# EAGLE board MyoWare_Power_Shield_Panel_v10 (EAGLE 7.4.0)
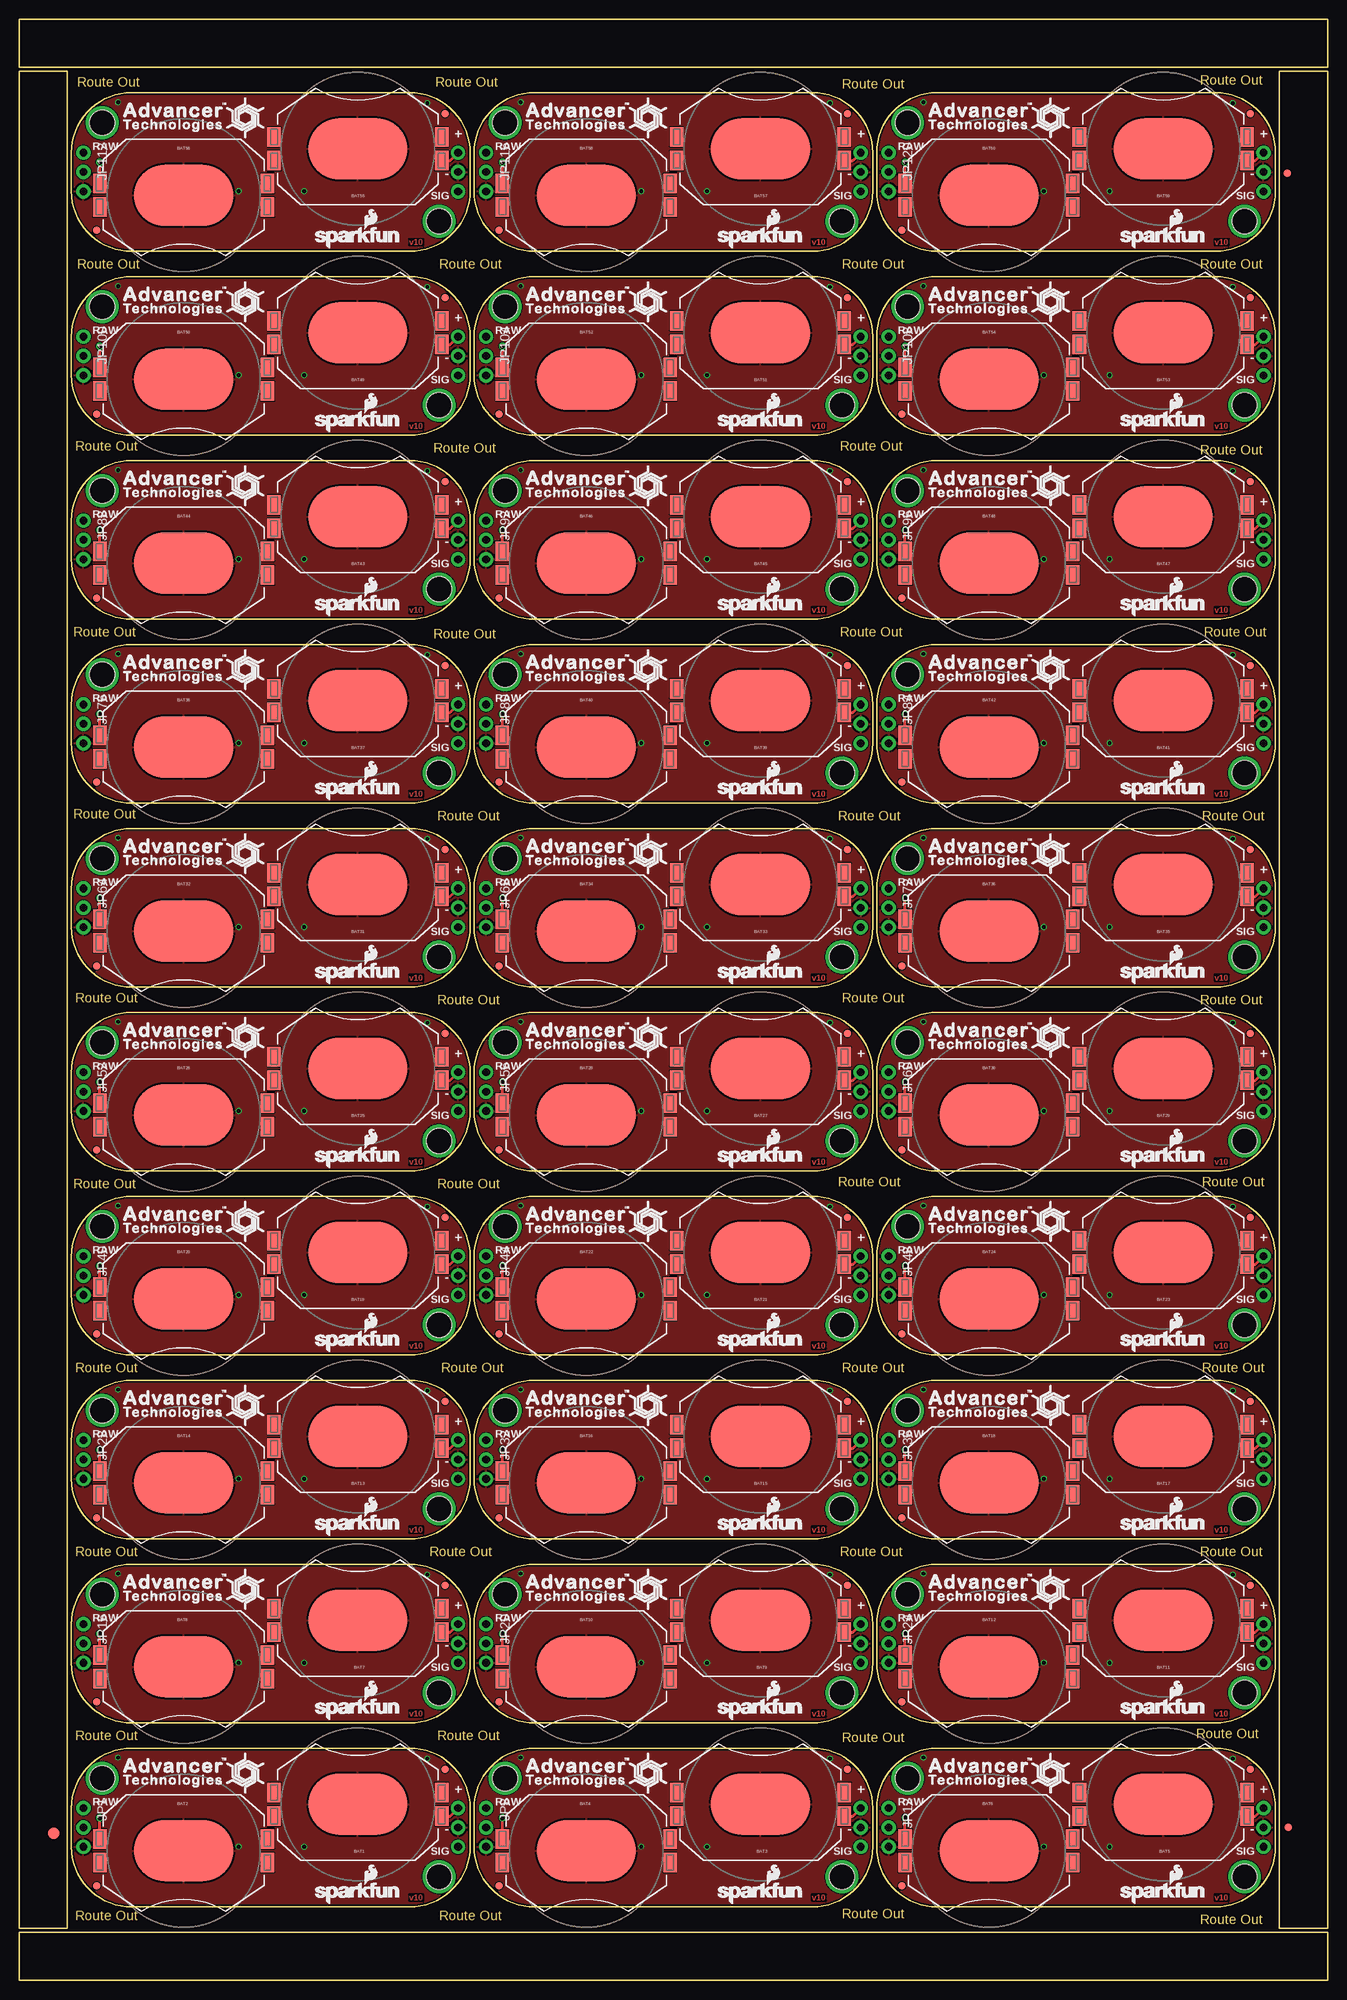
[diagram p0: board, top side]
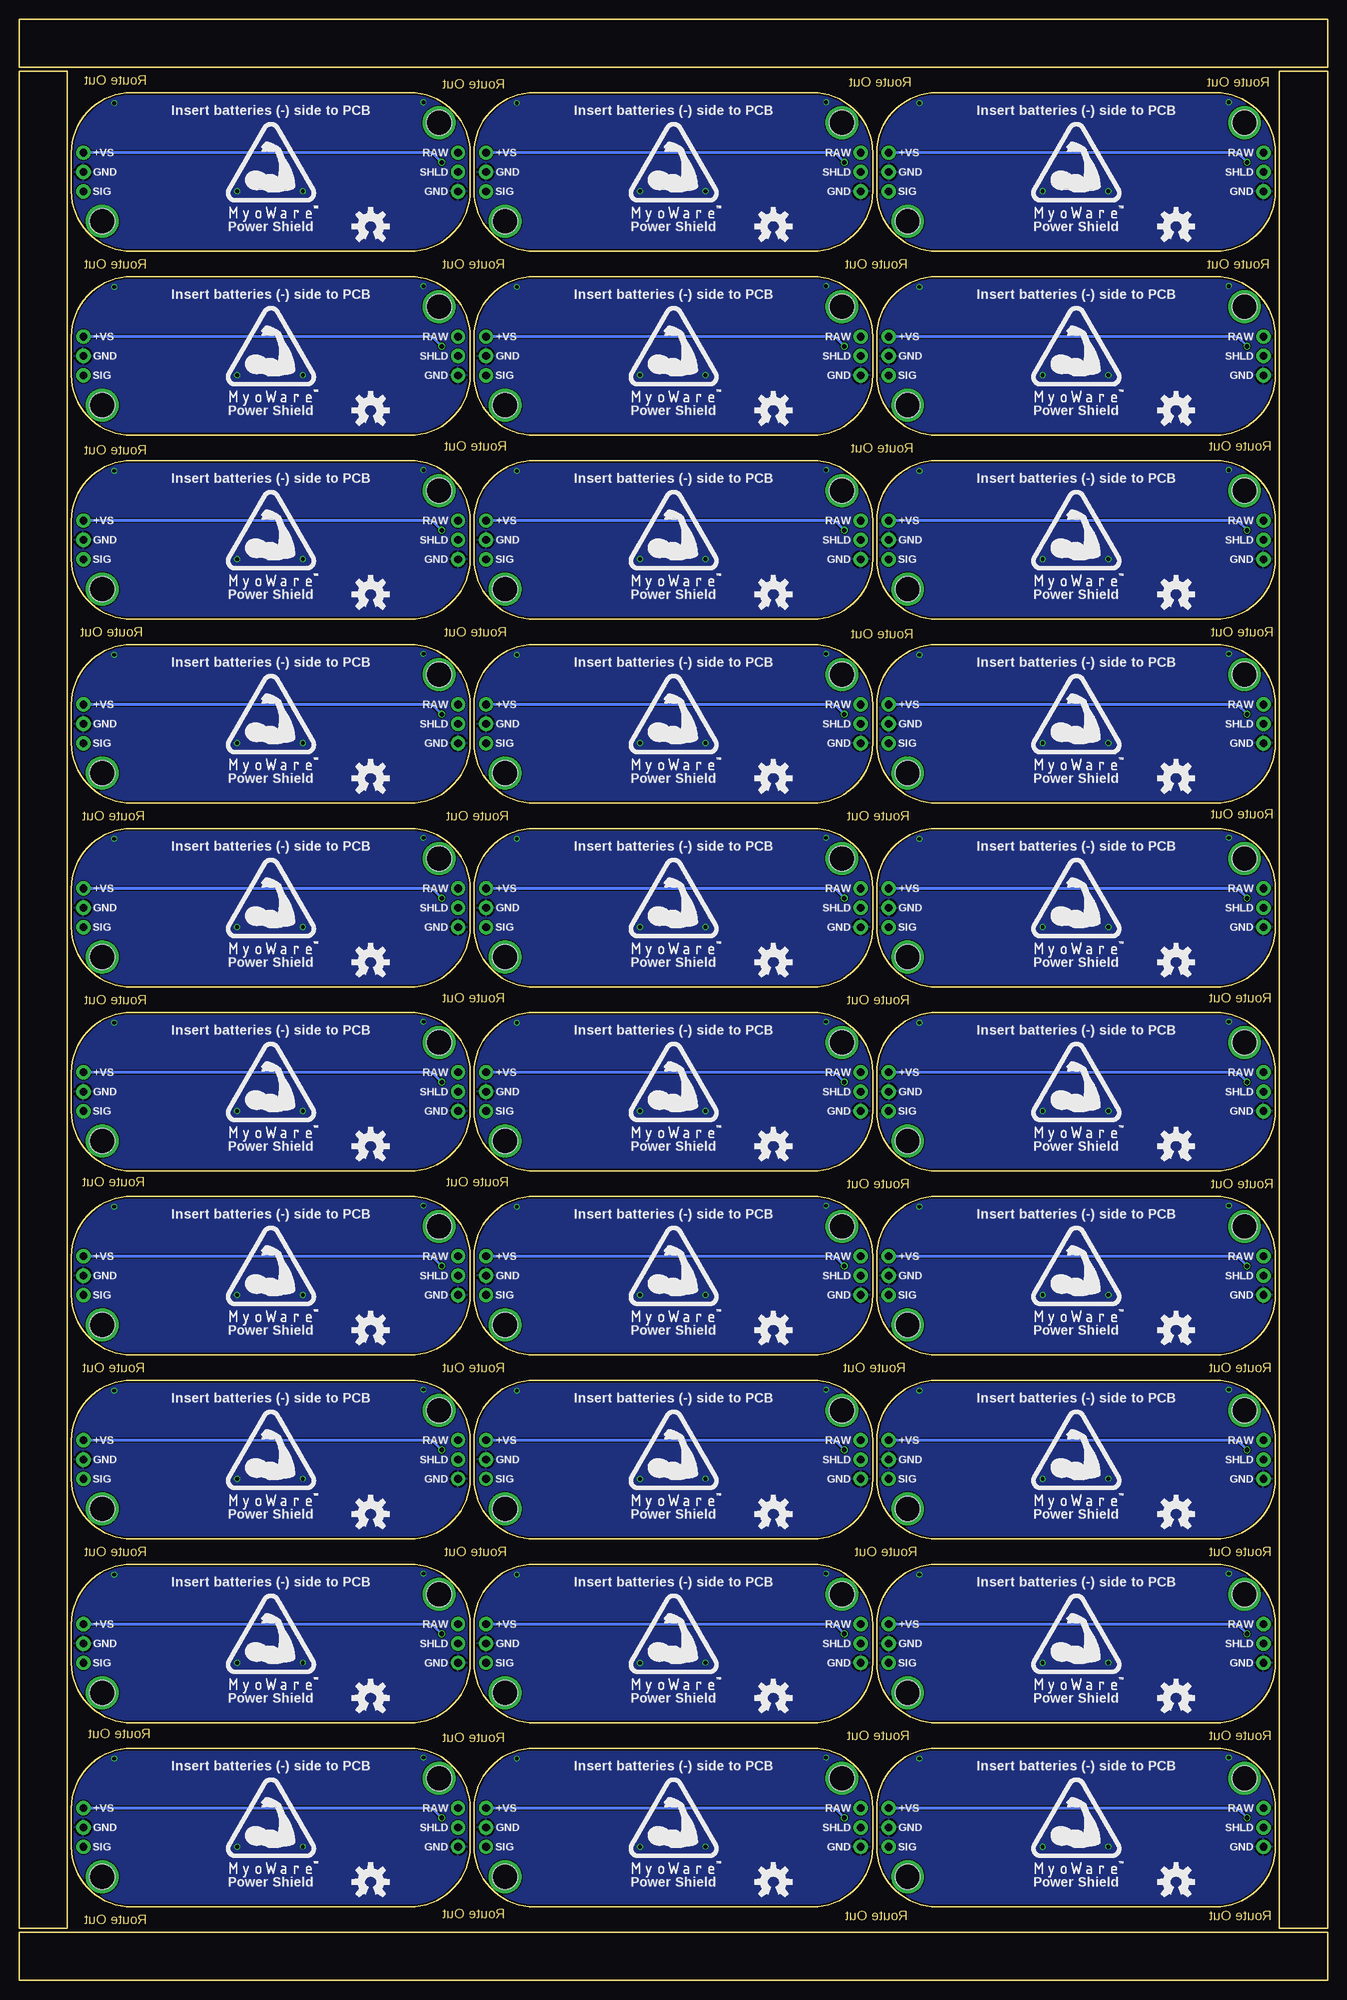
[diagram p1: board, bottom side, seen from below]

Size 171.7 x 257.3 mm. Coordinates in mm from the lower left corner, seen from the top.
Outline: 264 segments
Copper layers (1*16): Top 0.035mm / dielectric 1.5mm / Bottom 0.035mm
Design rules "Gold_Phoenix_Standard_Spec_2_layer": minimum track width 5mil, minimum drill 6mil, track to track 5mil, track to pad 5mil, pad to pad 5mil, via to via 5mil, smd to smd 5mil, copper to edge 8mil, drill to drill 8mil, minimum pad ring 5mil, minimum via ring 5mil, stop-mask expansion 4mil, vias tented up to drill 20mil, thermal gap 10mil

## Footprints (pad centres in the part's own frame; a part is rotated, then mirrored left to right if it is on the bottom)
BATTCON_20MM_4LEGS = smd 1.778 x 2.54: 1 -11,1.55; 3 11,1.55; P$1 -11,-1.55; P$2 11,-1.55 | smd 13 x 8: 2 0,0
FIDUCIAL-1.5X3 = smd 1.5 x 1.5: 1 0,0
FIDUCIAL-1X2 = smd 1 x 1: 1 0,0
1X03_NO_SILK = drill 1.016 pad 1.88: 1 0,0; 2 2.54,0; 3 5.08,0
STAND-OFF = hole 3.302: 0,0

## Placement (x,y rotation side)
BAT1  20mm coincell  [BATTCON_20MM_4LEGS]  44.45,23.11 180 top
BAT2  20mm coincell  [BATTCON_20MM_4LEGS]  21.59,17.02 0 top
BAT3  20mm coincell  [BATTCON_20MM_4LEGS]  97.28,23.11 180 top
BAT4  20mm coincell  [BATTCON_20MM_4LEGS]  74.42,17.02 0 top
BAT5  20mm coincell  [BATTCON_20MM_4LEGS]  150.11,23.11 180 top
BAT6  20mm coincell  [BATTCON_20MM_4LEGS]  127.25,17.02 0 top
BAT7  20mm coincell  [BATTCON_20MM_4LEGS]  44.45,47.24 180 top
BAT8  20mm coincell  [BATTCON_20MM_4LEGS]  21.59,41.15 0 top
BAT9  20mm coincell  [BATTCON_20MM_4LEGS]  97.28,47.24 180 top
BAT10  20mm coincell  [BATTCON_20MM_4LEGS]  74.42,41.15 0 top
BAT11  20mm coincell  [BATTCON_20MM_4LEGS]  150.11,47.24 180 top
BAT12  20mm coincell  [BATTCON_20MM_4LEGS]  127.25,41.15 0 top
BAT13  20mm coincell  [BATTCON_20MM_4LEGS]  44.45,71.37 180 top
BAT14  20mm coincell  [BATTCON_20MM_4LEGS]  21.59,65.28 0 top
BAT15  20mm coincell  [BATTCON_20MM_4LEGS]  97.28,71.37 180 top
BAT16  20mm coincell  [BATTCON_20MM_4LEGS]  74.42,65.28 0 top
BAT17  20mm coincell  [BATTCON_20MM_4LEGS]  150.11,71.37 180 top
BAT18  20mm coincell  [BATTCON_20MM_4LEGS]  127.25,65.28 0 top
BAT19  20mm coincell  [BATTCON_20MM_4LEGS]  44.45,95.5 180 top
BAT20  20mm coincell  [BATTCON_20MM_4LEGS]  21.59,89.41 0 top
BAT21  20mm coincell  [BATTCON_20MM_4LEGS]  97.28,95.5 180 top
BAT22  20mm coincell  [BATTCON_20MM_4LEGS]  74.42,89.41 0 top
BAT23  20mm coincell  [BATTCON_20MM_4LEGS]  150.11,95.5 180 top
BAT24  20mm coincell  [BATTCON_20MM_4LEGS]  127.25,89.41 0 top
BAT25  20mm coincell  [BATTCON_20MM_4LEGS]  44.45,119.63 180 top
BAT26  20mm coincell  [BATTCON_20MM_4LEGS]  21.59,113.54 0 top
BAT27  20mm coincell  [BATTCON_20MM_4LEGS]  97.28,119.63 180 top
BAT28  20mm coincell  [BATTCON_20MM_4LEGS]  74.42,113.54 0 top
BAT29  20mm coincell  [BATTCON_20MM_4LEGS]  150.11,119.63 180 top
BAT30  20mm coincell  [BATTCON_20MM_4LEGS]  127.25,113.54 0 top
BAT31  20mm coincell  [BATTCON_20MM_4LEGS]  44.45,143.76 180 top
BAT32  20mm coincell  [BATTCON_20MM_4LEGS]  21.59,137.67 0 top
BAT33  20mm coincell  [BATTCON_20MM_4LEGS]  97.28,143.76 180 top
BAT34  20mm coincell  [BATTCON_20MM_4LEGS]  74.42,137.67 0 top
BAT35  20mm coincell  [BATTCON_20MM_4LEGS]  150.11,143.76 180 top
BAT36  20mm coincell  [BATTCON_20MM_4LEGS]  127.25,137.67 0 top
BAT37  20mm coincell  [BATTCON_20MM_4LEGS]  44.45,167.89 180 top
BAT38  20mm coincell  [BATTCON_20MM_4LEGS]  21.59,161.8 0 top
BAT39  20mm coincell  [BATTCON_20MM_4LEGS]  97.28,167.89 180 top
BAT40  20mm coincell  [BATTCON_20MM_4LEGS]  74.42,161.8 0 top
BAT41  20mm coincell  [BATTCON_20MM_4LEGS]  150.11,167.89 180 top
BAT42  20mm coincell  [BATTCON_20MM_4LEGS]  127.25,161.8 0 top
BAT43  20mm coincell  [BATTCON_20MM_4LEGS]  44.45,192.02 180 top
BAT44  20mm coincell  [BATTCON_20MM_4LEGS]  21.59,185.93 0 top
BAT45  20mm coincell  [BATTCON_20MM_4LEGS]  97.28,192.02 180 top
BAT46  20mm coincell  [BATTCON_20MM_4LEGS]  74.42,185.93 0 top
BAT47  20mm coincell  [BATTCON_20MM_4LEGS]  150.11,192.02 180 top
BAT48  20mm coincell  [BATTCON_20MM_4LEGS]  127.25,185.93 0 top
BAT49  20mm coincell  [BATTCON_20MM_4LEGS]  44.45,216.15 180 top
BAT50  20mm coincell  [BATTCON_20MM_4LEGS]  21.59,210.06 0 top
BAT51  20mm coincell  [BATTCON_20MM_4LEGS]  97.28,216.15 180 top
BAT52  20mm coincell  [BATTCON_20MM_4LEGS]  74.42,210.06 0 top
BAT53  20mm coincell  [BATTCON_20MM_4LEGS]  150.11,216.15 180 top
BAT54  20mm coincell  [BATTCON_20MM_4LEGS]  127.25,210.06 0 top
BAT55  20mm coincell  [BATTCON_20MM_4LEGS]  44.45,240.28 180 top
BAT56  20mm coincell  [BATTCON_20MM_4LEGS]  21.59,234.19 0 top
BAT57  20mm coincell  [BATTCON_20MM_4LEGS]  97.28,240.28 180 top
BAT58  20mm coincell  [BATTCON_20MM_4LEGS]  74.42,234.19 0 top
BAT59  20mm coincell  [BATTCON_20MM_4LEGS]  150.11,240.28 180 top
BAT60  20mm coincell  [BATTCON_20MM_4LEGS]  127.25,234.19 0 top
E$1  [FIDUCIAL-1.5X3]  4.57,19.3 0 top
E$5  [FIDUCIAL-1X2]  166.5,20.07 0 top
E$8  [FIDUCIAL-1X2]  166.37,237.11 90 top
FID1  FIDUCIAL1X2  [FIDUCIAL-1X2]  10.16,12.45 0 top
FID2  FIDUCIAL1X2  [FIDUCIAL-1X2]  55.88,27.69 0 top
FID3  FIDUCIAL1X2  [FIDUCIAL-1X2]  62.99,12.45 0 top
FID4  FIDUCIAL1X2  [FIDUCIAL-1X2]  108.71,27.69 0 top
FID5  FIDUCIAL1X2  [FIDUCIAL-1X2]  115.82,12.45 0 top
FID6  FIDUCIAL1X2  [FIDUCIAL-1X2]  161.54,27.69 0 top
FID7  FIDUCIAL1X2  [FIDUCIAL-1X2]  10.16,36.58 0 top
FID8  FIDUCIAL1X2  [FIDUCIAL-1X2]  55.88,51.82 0 top
FID9  FIDUCIAL1X2  [FIDUCIAL-1X2]  62.99,36.58 0 top
FID10  FIDUCIAL1X2  [FIDUCIAL-1X2]  108.71,51.82 0 top
FID11  FIDUCIAL1X2  [FIDUCIAL-1X2]  115.82,36.58 0 top
FID12  FIDUCIAL1X2  [FIDUCIAL-1X2]  161.54,51.82 0 top
FID13  FIDUCIAL1X2  [FIDUCIAL-1X2]  10.16,60.71 0 top
FID14  FIDUCIAL1X2  [FIDUCIAL-1X2]  55.88,75.95 0 top
FID15  FIDUCIAL1X2  [FIDUCIAL-1X2]  62.99,60.71 0 top
FID16  FIDUCIAL1X2  [FIDUCIAL-1X2]  108.71,75.95 0 top
FID17  FIDUCIAL1X2  [FIDUCIAL-1X2]  115.82,60.71 0 top
FID18  FIDUCIAL1X2  [FIDUCIAL-1X2]  161.54,75.95 0 top
FID19  FIDUCIAL1X2  [FIDUCIAL-1X2]  10.16,84.84 0 top
FID20  FIDUCIAL1X2  [FIDUCIAL-1X2]  55.88,100.08 0 top
FID21  FIDUCIAL1X2  [FIDUCIAL-1X2]  62.99,84.84 0 top
FID22  FIDUCIAL1X2  [FIDUCIAL-1X2]  108.71,100.08 0 top
FID23  FIDUCIAL1X2  [FIDUCIAL-1X2]  115.82,84.84 0 top
FID24  FIDUCIAL1X2  [FIDUCIAL-1X2]  161.54,100.08 0 top
FID25  FIDUCIAL1X2  [FIDUCIAL-1X2]  10.16,108.97 0 top
FID26  FIDUCIAL1X2  [FIDUCIAL-1X2]  55.88,124.21 0 top
FID27  FIDUCIAL1X2  [FIDUCIAL-1X2]  62.99,108.97 0 top
FID28  FIDUCIAL1X2  [FIDUCIAL-1X2]  108.71,124.21 0 top
FID29  FIDUCIAL1X2  [FIDUCIAL-1X2]  115.82,108.97 0 top
FID30  FIDUCIAL1X2  [FIDUCIAL-1X2]  161.54,124.21 0 top
FID31  FIDUCIAL1X2  [FIDUCIAL-1X2]  10.16,133.1 0 top
FID32  FIDUCIAL1X2  [FIDUCIAL-1X2]  55.88,148.34 0 top
FID33  FIDUCIAL1X2  [FIDUCIAL-1X2]  62.99,133.1 0 top
FID34  FIDUCIAL1X2  [FIDUCIAL-1X2]  108.71,148.34 0 top
FID35  FIDUCIAL1X2  [FIDUCIAL-1X2]  115.82,133.1 0 top
FID36  FIDUCIAL1X2  [FIDUCIAL-1X2]  161.54,148.34 0 top
FID37  FIDUCIAL1X2  [FIDUCIAL-1X2]  10.16,157.23 0 top
FID38  FIDUCIAL1X2  [FIDUCIAL-1X2]  55.88,172.47 0 top
FID39  FIDUCIAL1X2  [FIDUCIAL-1X2]  62.99,157.23 0 top
FID40  FIDUCIAL1X2  [FIDUCIAL-1X2]  108.71,172.47 0 top
FID41  FIDUCIAL1X2  [FIDUCIAL-1X2]  115.82,157.23 0 top
FID42  FIDUCIAL1X2  [FIDUCIAL-1X2]  161.54,172.47 0 top
FID43  FIDUCIAL1X2  [FIDUCIAL-1X2]  10.16,181.36 0 top
FID44  FIDUCIAL1X2  [FIDUCIAL-1X2]  55.88,196.6 0 top
FID45  FIDUCIAL1X2  [FIDUCIAL-1X2]  62.99,181.36 0 top
FID46  FIDUCIAL1X2  [FIDUCIAL-1X2]  108.71,196.6 0 top
FID47  FIDUCIAL1X2  [FIDUCIAL-1X2]  115.82,181.36 0 top
FID48  FIDUCIAL1X2  [FIDUCIAL-1X2]  161.54,196.6 0 top
FID49  FIDUCIAL1X2  [FIDUCIAL-1X2]  10.16,205.49 0 top
FID50  FIDUCIAL1X2  [FIDUCIAL-1X2]  55.88,220.73 0 top
FID51  FIDUCIAL1X2  [FIDUCIAL-1X2]  62.99,205.49 0 top
FID52  FIDUCIAL1X2  [FIDUCIAL-1X2]  108.71,220.73 0 top
FID53  FIDUCIAL1X2  [FIDUCIAL-1X2]  115.82,205.49 0 top
FID54  FIDUCIAL1X2  [FIDUCIAL-1X2]  161.54,220.73 0 top
FID55  FIDUCIAL1X2  [FIDUCIAL-1X2]  10.16,229.62 0 top
FID56  FIDUCIAL1X2  [FIDUCIAL-1X2]  55.88,244.86 0 top
FID57  FIDUCIAL1X2  [FIDUCIAL-1X2]  62.99,229.62 0 top
FID58  FIDUCIAL1X2  [FIDUCIAL-1X2]  108.71,244.86 0 top
FID59  FIDUCIAL1X2  [FIDUCIAL-1X2]  115.82,229.62 0 top
FID60  FIDUCIAL1X2  [FIDUCIAL-1X2]  161.54,244.86 0 top
JP1  RAW  [1X03_NO_SILK]  8.45,22.61 270 top
JP2  PROCESSED  [1X03_NO_SILK]  57.59,22.61 270 top
JP3  STAND-OFF  [STAND-OFF]  55.12,13.59 0 top
JP4  STAND-OFF  [STAND-OFF]  10.92,26.54 0 top
JP5  PROCESSED  [1X03_NO_SILK]  110.43,22.61 270 top
JP6  STAND-OFF  [STAND-OFF]  107.95,13.59 0 top
JP7  STAND-OFF  [STAND-OFF]  63.75,26.54 0 top
JP8  RAW  [1X03_NO_SILK]  61.28,22.61 270 top
JP9  PROCESSED  [1X03_NO_SILK]  163.26,22.61 270 top
JP10  STAND-OFF  [STAND-OFF]  160.78,13.59 0 top
JP11  STAND-OFF  [STAND-OFF]  116.59,26.54 0 top
JP12  RAW  [1X03_NO_SILK]  114.11,22.61 270 top
JP13  PROCESSED  [1X03_NO_SILK]  57.59,46.74 270 top
JP14  STAND-OFF  [STAND-OFF]  55.12,37.72 0 top
JP15  STAND-OFF  [STAND-OFF]  10.92,50.67 0 top
JP16  RAW  [1X03_NO_SILK]  8.45,46.74 270 top
JP17  PROCESSED  [1X03_NO_SILK]  110.43,46.74 270 top
JP18  STAND-OFF  [STAND-OFF]  107.95,37.72 0 top
JP19  STAND-OFF  [STAND-OFF]  63.75,50.67 0 top
JP20  RAW  [1X03_NO_SILK]  61.28,46.74 270 top
JP21  PROCESSED  [1X03_NO_SILK]  163.26,46.74 270 top
JP22  STAND-OFF  [STAND-OFF]  160.78,37.72 0 top
JP23  STAND-OFF  [STAND-OFF]  116.59,50.67 0 top
JP24  RAW  [1X03_NO_SILK]  114.11,46.74 270 top
JP25  PROCESSED  [1X03_NO_SILK]  57.59,70.87 270 top
JP26  STAND-OFF  [STAND-OFF]  55.12,61.85 0 top
JP27  STAND-OFF  [STAND-OFF]  10.92,74.8 0 top
JP28  RAW  [1X03_NO_SILK]  8.45,70.87 270 top
JP29  PROCESSED  [1X03_NO_SILK]  110.43,70.87 270 top
JP30  STAND-OFF  [STAND-OFF]  107.95,61.85 0 top
JP31  STAND-OFF  [STAND-OFF]  63.75,74.8 0 top
JP32  RAW  [1X03_NO_SILK]  61.28,70.87 270 top
JP33  PROCESSED  [1X03_NO_SILK]  163.26,70.87 270 top
JP34  STAND-OFF  [STAND-OFF]  160.78,61.85 0 top
JP35  STAND-OFF  [STAND-OFF]  116.59,74.8 0 top
JP36  RAW  [1X03_NO_SILK]  114.11,70.87 270 top
JP37  PROCESSED  [1X03_NO_SILK]  57.59,95 270 top
JP38  STAND-OFF  [STAND-OFF]  55.12,85.98 0 top
JP39  STAND-OFF  [STAND-OFF]  10.92,98.93 0 top
JP40  RAW  [1X03_NO_SILK]  8.45,95 270 top
JP41  PROCESSED  [1X03_NO_SILK]  110.43,95 270 top
JP42  STAND-OFF  [STAND-OFF]  107.95,85.98 0 top
JP43  STAND-OFF  [STAND-OFF]  63.75,98.93 0 top
JP44  RAW  [1X03_NO_SILK]  61.28,95 270 top
JP45  PROCESSED  [1X03_NO_SILK]  163.26,95 270 top
JP46  STAND-OFF  [STAND-OFF]  160.78,85.98 0 top
JP47  STAND-OFF  [STAND-OFF]  116.59,98.93 0 top
JP48  RAW  [1X03_NO_SILK]  114.11,95 270 top
JP49  PROCESSED  [1X03_NO_SILK]  57.59,119.13 270 top
JP50  STAND-OFF  [STAND-OFF]  55.12,110.11 0 top
JP51  STAND-OFF  [STAND-OFF]  10.92,123.06 0 top
JP52  RAW  [1X03_NO_SILK]  8.45,119.13 270 top
JP53  PROCESSED  [1X03_NO_SILK]  110.43,119.13 270 top
JP54  STAND-OFF  [STAND-OFF]  107.95,110.11 0 top
JP55  STAND-OFF  [STAND-OFF]  63.75,123.06 0 top
JP56  RAW  [1X03_NO_SILK]  61.28,119.13 270 top
JP57  PROCESSED  [1X03_NO_SILK]  163.26,119.13 270 top
JP58  STAND-OFF  [STAND-OFF]  160.78,110.11 0 top
JP59  STAND-OFF  [STAND-OFF]  116.59,123.06 0 top
JP60  RAW  [1X03_NO_SILK]  114.11,119.13 270 top
JP61  PROCESSED  [1X03_NO_SILK]  57.59,143.26 270 top
JP62  STAND-OFF  [STAND-OFF]  55.12,134.24 0 top
JP63  STAND-OFF  [STAND-OFF]  10.92,147.19 0 top
JP64  RAW  [1X03_NO_SILK]  8.45,143.26 270 top
JP65  PROCESSED  [1X03_NO_SILK]  110.43,143.26 270 top
JP66  STAND-OFF  [STAND-OFF]  107.95,134.24 0 top
JP67  STAND-OFF  [STAND-OFF]  63.75,147.19 0 top
JP68  RAW  [1X03_NO_SILK]  61.28,143.26 270 top
JP69  PROCESSED  [1X03_NO_SILK]  163.26,143.26 270 top
JP70  STAND-OFF  [STAND-OFF]  160.78,134.24 0 top
JP71  STAND-OFF  [STAND-OFF]  116.59,147.19 0 top
JP72  RAW  [1X03_NO_SILK]  114.11,143.26 270 top
JP73  PROCESSED  [1X03_NO_SILK]  57.59,167.39 270 top
JP74  STAND-OFF  [STAND-OFF]  55.12,158.37 0 top
JP75  STAND-OFF  [STAND-OFF]  10.92,171.32 0 top
JP76  RAW  [1X03_NO_SILK]  8.45,167.39 270 top
JP77  PROCESSED  [1X03_NO_SILK]  110.43,167.39 270 top
JP78  STAND-OFF  [STAND-OFF]  107.95,158.37 0 top
JP79  STAND-OFF  [STAND-OFF]  63.75,171.32 0 top
JP80  RAW  [1X03_NO_SILK]  61.28,167.39 270 top
JP81  PROCESSED  [1X03_NO_SILK]  163.26,167.39 270 top
JP82  STAND-OFF  [STAND-OFF]  160.78,158.37 0 top
JP83  STAND-OFF  [STAND-OFF]  116.59,171.32 0 top
JP84  RAW  [1X03_NO_SILK]  114.11,167.39 270 top
JP85  PROCESSED  [1X03_NO_SILK]  57.59,191.52 270 top
JP86  STAND-OFF  [STAND-OFF]  55.12,182.5 0 top
JP87  STAND-OFF  [STAND-OFF]  10.92,195.45 0 top
JP88  RAW  [1X03_NO_SILK]  8.45,191.52 270 top
JP89  PROCESSED  [1X03_NO_SILK]  110.43,191.52 270 top
JP90  STAND-OFF  [STAND-OFF]  107.95,182.5 0 top
JP91  STAND-OFF  [STAND-OFF]  63.75,195.45 0 top
JP92  RAW  [1X03_NO_SILK]  61.28,191.52 270 top
JP93  PROCESSED  [1X03_NO_SILK]  163.26,191.52 270 top
JP94  STAND-OFF  [STAND-OFF]  160.78,182.5 0 top
JP95  STAND-OFF  [STAND-OFF]  116.59,195.45 0 top
JP96  RAW  [1X03_NO_SILK]  114.11,191.52 270 top
JP97  PROCESSED  [1X03_NO_SILK]  57.59,215.65 270 top
JP98  STAND-OFF  [STAND-OFF]  55.12,206.63 0 top
JP99  STAND-OFF  [STAND-OFF]  10.92,219.58 0 top
JP100  RAW  [1X03_NO_SILK]  8.45,215.65 270 top
JP101  PROCESSED  [1X03_NO_SILK]  110.43,215.65 270 top
JP102  STAND-OFF  [STAND-OFF]  107.95,206.63 0 top
JP103  STAND-OFF  [STAND-OFF]  63.75,219.58 0 top
JP104  RAW  [1X03_NO_SILK]  61.28,215.65 270 top
JP105  PROCESSED  [1X03_NO_SILK]  163.26,215.65 270 top
JP106  STAND-OFF  [STAND-OFF]  160.78,206.63 0 top
JP107  STAND-OFF  [STAND-OFF]  116.59,219.58 0 top
JP108  RAW  [1X03_NO_SILK]  114.11,215.65 270 top
JP109  PROCESSED  [1X03_NO_SILK]  57.59,239.78 270 top
JP110  STAND-OFF  [STAND-OFF]  55.12,230.76 0 top
JP111  STAND-OFF  [STAND-OFF]  10.92,243.71 0 top
JP112  RAW  [1X03_NO_SILK]  8.45,239.78 270 top
JP113  PROCESSED  [1X03_NO_SILK]  110.43,239.78 270 top
JP114  STAND-OFF  [STAND-OFF]  107.95,230.76 0 top
JP115  STAND-OFF  [STAND-OFF]  63.75,243.71 0 top
JP116  RAW  [1X03_NO_SILK]  61.28,239.78 270 top
JP117  PROCESSED  [1X03_NO_SILK]  163.26,239.78 270 top
JP118  STAND-OFF  [STAND-OFF]  160.78,230.76 0 top
JP119  STAND-OFF  [STAND-OFF]  116.59,243.71 0 top
JP120  RAW  [1X03_NO_SILK]  114.11,239.78 270 top
LOGO1  SFE_LOGO_NAME_FLAME.1_INCH  [SFE_LOGO_NAME_FLAME_.1]  38.46,9.95 0 top
LOGO2  OSHW-LOGOM  [OSHW-LOGO-M]  19.91,12.92 0 bottom
LOGO3  SFE_LOGO_NAME_FLAME.1_INCH  [SFE_LOGO_NAME_FLAME_.1]  91.29,9.95 0 top
LOGO4  OSHW-LOGOM  [OSHW-LOGO-M]  72.74,12.92 0 bottom
LOGO5  SFE_LOGO_NAME_FLAME.1_INCH  [SFE_LOGO_NAME_FLAME_.1]  144.12,9.95 0 top
LOGO6  OSHW-LOGOM  [OSHW-LOGO-M]  125.57,12.92 0 bottom
LOGO7  SFE_LOGO_NAME_FLAME.1_INCH  [SFE_LOGO_NAME_FLAME_.1]  38.46,34.08 0 top
LOGO8  OSHW-LOGOM  [OSHW-LOGO-M]  19.91,37.05 0 bottom
LOGO9  SFE_LOGO_NAME_FLAME.1_INCH  [SFE_LOGO_NAME_FLAME_.1]  91.29,34.08 0 top
LOGO10  OSHW-LOGOM  [OSHW-LOGO-M]  72.74,37.05 0 bottom
LOGO11  SFE_LOGO_NAME_FLAME.1_INCH  [SFE_LOGO_NAME_FLAME_.1]  144.12,34.08 0 top
LOGO12  OSHW-LOGOM  [OSHW-LOGO-M]  125.57,37.05 0 bottom
LOGO13  SFE_LOGO_NAME_FLAME.1_INCH  [SFE_LOGO_NAME_FLAME_.1]  38.46,58.21 0 top
LOGO14  OSHW-LOGOM  [OSHW-LOGO-M]  19.91,61.18 0 bottom
LOGO15  SFE_LOGO_NAME_FLAME.1_INCH  [SFE_LOGO_NAME_FLAME_.1]  91.29,58.21 0 top
LOGO16  OSHW-LOGOM  [OSHW-LOGO-M]  72.74,61.18 0 bottom
LOGO17  SFE_LOGO_NAME_FLAME.1_INCH  [SFE_LOGO_NAME_FLAME_.1]  144.12,58.21 0 top
LOGO18  OSHW-LOGOM  [OSHW-LOGO-M]  125.57,61.18 0 bottom
LOGO19  SFE_LOGO_NAME_FLAME.1_INCH  [SFE_LOGO_NAME_FLAME_.1]  38.46,82.34 0 top
LOGO20  OSHW-LOGOM  [OSHW-LOGO-M]  19.91,85.31 0 bottom
LOGO21  SFE_LOGO_NAME_FLAME.1_INCH  [SFE_LOGO_NAME_FLAME_.1]  91.29,82.34 0 top
LOGO22  OSHW-LOGOM  [OSHW-LOGO-M]  72.74,85.31 0 bottom
LOGO23  SFE_LOGO_NAME_FLAME.1_INCH  [SFE_LOGO_NAME_FLAME_.1]  144.12,82.34 0 top
LOGO24  OSHW-LOGOM  [OSHW-LOGO-M]  125.57,85.31 0 bottom
LOGO25  SFE_LOGO_NAME_FLAME.1_INCH  [SFE_LOGO_NAME_FLAME_.1]  38.46,106.47 0 top
LOGO26  OSHW-LOGOM  [OSHW-LOGO-M]  19.91,109.44 0 bottom
LOGO27  SFE_LOGO_NAME_FLAME.1_INCH  [SFE_LOGO_NAME_FLAME_.1]  91.29,106.47 0 top
LOGO28  OSHW-LOGOM  [OSHW-LOGO-M]  72.74,109.44 0 bottom
LOGO29  SFE_LOGO_NAME_FLAME.1_INCH  [SFE_LOGO_NAME_FLAME_.1]  144.12,106.47 0 top
LOGO30  OSHW-LOGOM  [OSHW-LOGO-M]  125.57,109.44 0 bottom
LOGO31  SFE_LOGO_NAME_FLAME.1_INCH  [SFE_LOGO_NAME_FLAME_.1]  38.46,130.6 0 top
LOGO32  OSHW-LOGOM  [OSHW-LOGO-M]  19.91,133.57 0 bottom
LOGO33  SFE_LOGO_NAME_FLAME.1_INCH  [SFE_LOGO_NAME_FLAME_.1]  91.29,130.6 0 top
LOGO34  OSHW-LOGOM  [OSHW-LOGO-M]  72.74,133.57 0 bottom
LOGO35  SFE_LOGO_NAME_FLAME.1_INCH  [SFE_LOGO_NAME_FLAME_.1]  144.12,130.6 0 top
LOGO36  OSHW-LOGOM  [OSHW-LOGO-M]  125.57,133.57 0 bottom
LOGO37  SFE_LOGO_NAME_FLAME.1_INCH  [SFE_LOGO_NAME_FLAME_.1]  38.46,154.73 0 top
LOGO38  OSHW-LOGOM  [OSHW-LOGO-M]  19.91,157.7 0 bottom
LOGO39  SFE_LOGO_NAME_FLAME.1_INCH  [SFE_LOGO_NAME_FLAME_.1]  91.29,154.73 0 top
LOGO40  OSHW-LOGOM  [OSHW-LOGO-M]  72.74,157.7 0 bottom
LOGO41  SFE_LOGO_NAME_FLAME.1_INCH  [SFE_LOGO_NAME_FLAME_.1]  144.12,154.73 0 top
LOGO42  OSHW-LOGOM  [OSHW-LOGO-M]  125.57,157.7 0 bottom
LOGO43  SFE_LOGO_NAME_FLAME.1_INCH  [SFE_LOGO_NAME_FLAME_.1]  38.46,178.86 0 top
LOGO44  OSHW-LOGOM  [OSHW-LOGO-M]  19.91,181.83 0 bottom
LOGO45  SFE_LOGO_NAME_FLAME.1_INCH  [SFE_LOGO_NAME_FLAME_.1]  91.29,178.86 0 top
LOGO46  OSHW-LOGOM  [OSHW-LOGO-M]  72.74,181.83 0 bottom
LOGO47  SFE_LOGO_NAME_FLAME.1_INCH  [SFE_LOGO_NAME_FLAME_.1]  144.12,178.86 0 top
LOGO48  OSHW-LOGOM  [OSHW-LOGO-M]  125.57,181.83 0 bottom
LOGO49  SFE_LOGO_NAME_FLAME.1_INCH  [SFE_LOGO_NAME_FLAME_.1]  38.46,202.99 0 top
LOGO50  OSHW-LOGOM  [OSHW-LOGO-M]  19.91,205.96 0 bottom
LOGO51  SFE_LOGO_NAME_FLAME.1_INCH  [SFE_LOGO_NAME_FLAME_.1]  91.29,202.99 0 top
LOGO52  OSHW-LOGOM  [OSHW-LOGO-M]  72.74,205.96 0 bottom
LOGO53  SFE_LOGO_NAME_FLAME.1_INCH  [SFE_LOGO_NAME_FLAME_.1]  144.12,202.99 0 top
LOGO54  OSHW-LOGOM  [OSHW-LOGO-M]  125.57,205.96 0 bottom
LOGO55  SFE_LOGO_NAME_FLAME.1_INCH  [SFE_LOGO_NAME_FLAME_.1]  38.46,227.12 0 top
LOGO56  OSHW-LOGOM  [OSHW-LOGO-M]  19.91,230.09 0 bottom
LOGO57  SFE_LOGO_NAME_FLAME.1_INCH  [SFE_LOGO_NAME_FLAME_.1]  91.29,227.12 0 top
LOGO58  OSHW-LOGOM  [OSHW-LOGO-M]  72.74,230.09 0 bottom
LOGO59  SFE_LOGO_NAME_FLAME.1_INCH  [SFE_LOGO_NAME_FLAME_.1]  144.12,227.12 0 top
LOGO60  OSHW-LOGOM  [OSHW-LOGO-M]  125.57,230.09 0 bottom
U$1  [MYOWARE_LOGO]  33.02,20.07 0 bottom
U$2  [ADVANCER_LOGO]  20.07,27.05 0 top
U$3  [SPIRAL_LOGO_60%]  82.55,27.18 0 top
U$4  [ADVANCER_LOGO]  72.9,27.05 0 top
U$5  [MYOWARE_LOGO]  85.85,20.07 0 bottom
U$6  [SPIRAL_LOGO_60%]  135.38,27.18 0 top
U$7  [ADVANCER_LOGO]  125.73,27.05 0 top
U$8  [MYOWARE_LOGO]  138.68,20.07 0 bottom
U$9  [SPIRAL_LOGO_60%]  29.72,27.18 0 top
U$10  [SPIRAL_LOGO_60%]  29.72,51.31 0 top
U$11  [ADVANCER_LOGO]  20.07,51.18 0 top
U$12  [MYOWARE_LOGO]  33.02,44.2 0 bottom
U$13  [SPIRAL_LOGO_60%]  82.55,51.31 0 top
U$14  [ADVANCER_LOGO]  72.9,51.18 0 top
U$15  [MYOWARE_LOGO]  85.85,44.2 0 bottom
U$16  [SPIRAL_LOGO_60%]  135.38,51.31 0 top
U$17  [ADVANCER_LOGO]  125.73,51.18 0 top
U$18  [MYOWARE_LOGO]  138.68,44.2 0 bottom
U$19  [SPIRAL_LOGO_60%]  29.72,75.44 0 top
U$20  [ADVANCER_LOGO]  20.07,75.31 0 top
U$21  [MYOWARE_LOGO]  33.02,68.33 0 bottom
U$22  [SPIRAL_LOGO_60%]  82.55,75.44 0 top
U$23  [ADVANCER_LOGO]  72.9,75.31 0 top
U$24  [MYOWARE_LOGO]  85.85,68.33 0 bottom
U$25  [SPIRAL_LOGO_60%]  135.38,75.44 0 top
U$26  [ADVANCER_LOGO]  125.73,75.31 0 top
U$27  [MYOWARE_LOGO]  138.68,68.33 0 bottom
U$28  [SPIRAL_LOGO_60%]  29.72,99.57 0 top
U$29  [ADVANCER_LOGO]  20.07,99.44 0 top
U$30  [MYOWARE_LOGO]  33.02,92.46 0 bottom
U$31  [SPIRAL_LOGO_60%]  82.55,99.57 0 top
U$32  [ADVANCER_LOGO]  72.9,99.44 0 top
U$33  [MYOWARE_LOGO]  85.85,92.46 0 bottom
U$34  [SPIRAL_LOGO_60%]  135.38,99.57 0 top
U$35  [ADVANCER_LOGO]  125.73,99.44 0 top
U$36  [MYOWARE_LOGO]  138.68,92.46 0 bottom
U$37  [SPIRAL_LOGO_60%]  29.72,123.7 0 top
U$38  [ADVANCER_LOGO]  20.07,123.57 0 top
U$39  [MYOWARE_LOGO]  33.02,116.59 0 bottom
U$40  [SPIRAL_LOGO_60%]  82.55,123.7 0 top
U$41  [ADVANCER_LOGO]  72.9,123.57 0 top
U$42  [MYOWARE_LOGO]  85.85,116.59 0 bottom
U$43  [SPIRAL_LOGO_60%]  135.38,123.7 0 top
U$44  [ADVANCER_LOGO]  125.73,123.57 0 top
U$45  [MYOWARE_LOGO]  138.68,116.59 0 bottom
U$46  [SPIRAL_LOGO_60%]  29.72,147.83 0 top
U$47  [ADVANCER_LOGO]  20.07,147.7 0 top
U$48  [MYOWARE_LOGO]  33.02,140.72 0 bottom
U$49  [SPIRAL_LOGO_60%]  82.55,147.83 0 top
U$50  [ADVANCER_LOGO]  72.9,147.7 0 top
U$51  [MYOWARE_LOGO]  85.85,140.72 0 bottom
U$52  [SPIRAL_LOGO_60%]  135.38,147.83 0 top
U$53  [ADVANCER_LOGO]  125.73,147.7 0 top
U$54  [MYOWARE_LOGO]  138.68,140.72 0 bottom
U$55  [SPIRAL_LOGO_60%]  29.72,171.96 0 top
U$56  [ADVANCER_LOGO]  20.07,171.83 0 top
U$57  [MYOWARE_LOGO]  33.02,164.85 0 bottom
U$58  [SPIRAL_LOGO_60%]  82.55,171.96 0 top
U$59  [ADVANCER_LOGO]  72.9,171.83 0 top
U$60  [MYOWARE_LOGO]  85.85,164.85 0 bottom
U$61  [SPIRAL_LOGO_60%]  135.38,171.96 0 top
U$62  [ADVANCER_LOGO]  125.73,171.83 0 top
U$63  [MYOWARE_LOGO]  138.68,164.85 0 bottom
U$64  [SPIRAL_LOGO_60%]  29.72,196.09 0 top
U$65  [ADVANCER_LOGO]  20.07,195.96 0 top
U$66  [MYOWARE_LOGO]  33.02,188.98 0 bottom
U$67  [SPIRAL_LOGO_60%]  82.55,196.09 0 top
U$68  [ADVANCER_LOGO]  72.9,195.96 0 top
U$69  [MYOWARE_LOGO]  85.85,188.98 0 bottom
U$70  [SPIRAL_LOGO_60%]  135.38,196.09 0 top
U$71  [ADVANCER_LOGO]  125.73,195.96 0 top
U$72  [MYOWARE_LOGO]  138.68,188.98 0 bottom
U$73  [SPIRAL_LOGO_60%]  29.72,220.22 0 top
U$74  [ADVANCER_LOGO]  20.07,220.09 0 top
U$75  [MYOWARE_LOGO]  33.02,213.11 0 bottom
U$76  [SPIRAL_LOGO_60%]  82.55,220.22 0 top
U$77  [ADVANCER_LOGO]  72.9,220.09 0 top
U$78  [MYOWARE_LOGO]  85.85,213.11 0 bottom
U$79  [SPIRAL_LOGO_60%]  135.38,220.22 0 top
U$80  [ADVANCER_LOGO]  125.73,220.09 0 top
U$81  [MYOWARE_LOGO]  138.68,213.11 0 bottom
U$82  [SPIRAL_LOGO_60%]  29.72,244.35 0 top
U$83  [ADVANCER_LOGO]  20.07,244.22 0 top
U$84  [MYOWARE_LOGO]  33.02,237.24 0 bottom
U$85  [SPIRAL_LOGO_60%]  82.55,244.35 0 top
U$86  [ADVANCER_LOGO]  72.9,244.22 0 top
U$87  [MYOWARE_LOGO]  85.85,237.24 0 bottom
U$88  [SPIRAL_LOGO_60%]  135.38,244.35 0 top
U$89  [ADVANCER_LOGO]  125.73,244.22 0 top
U$90  [MYOWARE_LOGO]  138.68,237.24 0 bottom

## Library data of the parts
BAT1-BAT60 = SparkFun-Electromechanical; PROD_ID: BATT-10373
E$1 = SparkFun-Retired
E$5 E$8 FID1-FID60 LOGO1-LOGO60 = SparkFun-Aesthetics
JP1 JP2 JP5 JP8 JP9 JP12 JP13 JP16 JP17 JP20 JP21 JP24 JP25 JP28 JP29 JP32 JP33 JP36 JP37 JP40 JP41 JP44 JP45 JP48 JP49 JP52 JP53 JP56 JP57 JP60 JP61 JP64 JP65 JP68 JP69 JP72 JP73 JP76 JP77 JP80 JP81 JP84 JP85 JP88 JP89 JP92 JP93 JP96 JP97 JP100 JP101 JP104 JP105 JP108 JP109 JP112 JP113 JP116 JP117 JP120 = SparkFun-Connectors
JP3 JP4 JP6 JP7 JP10 JP11 JP14 JP15 JP18 JP19 JP22 JP23 JP26 JP27 JP30 JP31 JP34 JP35 JP38 JP39 JP42 JP43 JP46 JP47 JP50 JP51 JP54 JP55 JP58 JP59 JP62 JP63 JP66 JP67 JP70 JP71 JP74 JP75 JP78 JP79 JP82 JP83 JP86 JP87 JP90 JP91 JP94 JP95 JP98 JP99 JP102 JP103 JP106 JP107 JP110 JP111 JP114 JP115 JP118 JP119 = SparkFunJan2012
U$1-U$90 = advancer-technologies

## Nets
GND: BAT1.2 BAT2.2 JP1.3 JP2.2
GND1: BAT3.2 BAT4.2 JP5.2 JP8.3
GND2: BAT5.2 BAT6.2 JP9.2 JP12.3
GND3: BAT7.2 BAT8.2 JP13.2 JP16.3
GND4: BAT9.2 BAT10.2 JP17.2 JP20.3
GND5: BAT11.2 BAT12.2 JP21.2 JP24.3
GND6: BAT13.2 BAT14.2 JP25.2 JP28.3
GND7: BAT15.2 BAT16.2 JP29.2 JP32.3
GND8: BAT17.2 BAT18.2 JP33.2 JP36.3
GND9: BAT19.2 BAT20.2 JP37.2 JP40.3
GND10: BAT21.2 BAT22.2 JP41.2 JP44.3
GND11: BAT23.2 BAT24.2 JP45.2 JP48.3
GND12: BAT25.2 BAT26.2 JP49.2 JP52.3
GND13: BAT27.2 BAT28.2 JP53.2 JP56.3
GND14: BAT29.2 BAT30.2 JP57.2 JP60.3
GND15: BAT31.2 BAT32.2 JP61.2 JP64.3
GND16: BAT33.2 BAT34.2 JP65.2 JP68.3
GND17: BAT35.2 BAT36.2 JP69.2 JP72.3
GND18: BAT37.2 BAT38.2 JP73.2 JP76.3
GND19: BAT39.2 BAT40.2 JP77.2 JP80.3
GND20: BAT41.2 BAT42.2 JP81.2 JP84.3
GND21: BAT43.2 BAT44.2 JP85.2 JP88.3
GND22: BAT45.2 BAT46.2 JP89.2 JP92.3
GND23: BAT47.2 BAT48.2 JP93.2 JP96.3
GND24: BAT49.2 BAT50.2 JP97.2 JP100.3
GND25: BAT51.2 BAT52.2 JP101.2 JP104.3
GND26: BAT53.2 BAT54.2 JP105.2 JP108.3
GND27: BAT55.2 BAT56.2 JP109.2 JP112.3
GND28: BAT57.2 BAT58.2 JP113.2 JP116.3
GND29: BAT59.2 BAT60.2 JP117.2 JP120.3
RAW: JP1.1
RAW1: JP8.1
RAW2: JP12.1
RAW3: JP16.1
RAW4: JP20.1
RAW5: JP24.1
RAW6: JP28.1
RAW7: JP32.1
RAW8: JP36.1
RAW9: JP40.1
RAW10: JP44.1
RAW11: JP48.1
RAW12: JP52.1
RAW13: JP56.1
RAW14: JP60.1
RAW15: JP64.1
RAW16: JP68.1
RAW17: JP72.1
RAW18: JP76.1
RAW19: JP80.1
RAW20: JP84.1
RAW21: JP88.1
RAW22: JP92.1
RAW23: JP96.1
RAW24: JP100.1
RAW25: JP104.1
RAW26: JP108.1
RAW27: JP112.1
RAW28: JP116.1
RAW29: JP120.1
SHLD: JP1.2
SHLD1: JP8.2
SHLD2: JP12.2
SHLD3: JP16.2
SHLD4: JP20.2
SHLD5: JP24.2
SHLD6: JP28.2
SHLD7: JP32.2
SHLD8: JP36.2
SHLD9: JP40.2
SHLD10: JP44.2
SHLD11: JP48.2
SHLD12: JP52.2
SHLD13: JP56.2
SHLD14: JP60.2
SHLD15: JP64.2
SHLD16: JP68.2
SHLD17: JP72.2
SHLD18: JP76.2
SHLD19: JP80.2
SHLD20: JP84.2
SHLD21: JP88.2
SHLD22: JP92.2
SHLD23: JP96.2
SHLD24: JP100.2
SHLD25: JP104.2
SHLD26: JP108.2
SHLD27: JP112.2
SHLD28: JP116.2
SHLD29: JP120.2
SIG: JP2.3
SIG1: JP5.3
SIG2: JP9.3
SIG3: JP13.3
SIG4: JP17.3
SIG5: JP21.3
SIG6: JP25.3
SIG7: JP29.3
SIG8: JP33.3
SIG9: JP37.3
SIG10: JP41.3
SIG11: JP45.3
SIG12: JP49.3
SIG13: JP53.3
SIG14: JP57.3
SIG15: JP61.3
SIG16: JP65.3
SIG17: JP69.3
SIG18: JP73.3
SIG19: JP77.3
SIG20: JP81.3
SIG21: JP85.3
SIG22: JP89.3
SIG23: JP93.3
SIG24: JP97.3
SIG25: JP101.3
SIG26: JP105.3
SIG27: JP109.3
SIG28: JP113.3
SIG29: JP117.3
VCC: BAT1.1 BAT2.1 JP2.1
VCC1: BAT3.1 BAT4.1 JP5.1
VCC2: BAT5.1 BAT6.1 JP9.1
VCC3: BAT7.1 BAT8.1 JP13.1
VCC4: BAT9.1 BAT10.1 JP17.1
VCC5: BAT11.1 BAT12.1 JP21.1
VCC6: BAT13.1 BAT14.1 JP25.1
VCC7: BAT15.1 BAT16.1 JP29.1
VCC8: BAT17.1 BAT18.1 JP33.1
VCC9: BAT19.1 BAT20.1 JP37.1
VCC10: BAT21.1 BAT22.1 JP41.1
VCC11: BAT23.1 BAT24.1 JP45.1
VCC12: BAT25.1 BAT26.1 JP49.1
VCC13: BAT27.1 BAT28.1 JP53.1
VCC14: BAT29.1 BAT30.1 JP57.1
VCC15: BAT31.1 BAT32.1 JP61.1
VCC16: BAT33.1 BAT34.1 JP65.1
VCC17: BAT35.1 BAT36.1 JP69.1
VCC18: BAT37.1 BAT38.1 JP73.1
VCC19: BAT39.1 BAT40.1 JP77.1
VCC20: BAT41.1 BAT42.1 JP81.1
VCC21: BAT43.1 BAT44.1 JP85.1
VCC22: BAT45.1 BAT46.1 JP89.1
VCC23: BAT47.1 BAT48.1 JP93.1
VCC24: BAT49.1 BAT50.1 JP97.1
VCC25: BAT51.1 BAT52.1 JP101.1
VCC26: BAT53.1 BAT54.1 JP105.1
VCC27: BAT55.1 BAT56.1 JP109.1
VCC28: BAT57.1 BAT58.1 JP113.1
VCC29: BAT59.1 BAT60.1 JP117.1

## Tracks (layer width: path | path; a pad name or v marks a point on that pad's centre or on a via)
GND  (via drill 0.51)
  other vias: 28.8,17.56 12.99,29.24 53.56,29.11 37.41,17.55
  pour Top: 6.86,9.65 59.18,9.65 59.18,30.48 6.86,30.48
  pour Bottom: 6.86,9.65 59.18,9.65 59.18,30.48 6.86,30.48
GND1  (via drill 0.51)
  other vias: 81.63,17.56 65.82,29.24 106.39,29.11 90.24,17.55
  pour Top: 59.69,9.65 112.01,9.65 112.01,30.48 59.69,30.48
  pour Bottom: 59.69,9.65 112.01,9.65 112.01,30.48 59.69,30.48
GND2  (via drill 0.51)
  other vias: 134.46,17.56 118.65,29.24 159.23,29.11 143.07,17.55
  pour Top: 112.52,9.65 164.85,9.65 164.85,30.48 112.52,30.48
  pour Bottom: 112.52,9.65 164.85,9.65 164.85,30.48 112.52,30.48
GND3  (via drill 0.51)
  other vias: 28.8,41.69 12.99,53.37 53.56,53.24 37.41,41.68
  pour Top: 6.86,33.78 59.18,33.78 59.18,54.61 6.86,54.61
  pour Bottom: 6.86,33.78 59.18,33.78 59.18,54.61 6.86,54.61
GND4  (via drill 0.51)
  other vias: 81.63,41.69 65.82,53.37 106.39,53.24 90.24,41.68
  pour Top: 59.69,33.78 112.01,33.78 112.01,54.61 59.69,54.61
  pour Bottom: 59.69,33.78 112.01,33.78 112.01,54.61 59.69,54.61
GND5  (via drill 0.51)
  other vias: 134.46,41.69 118.65,53.37 159.23,53.24 143.07,41.68
  pour Top: 112.52,33.78 164.85,33.78 164.85,54.61 112.52,54.61
  pour Bottom: 112.52,33.78 164.85,33.78 164.85,54.61 112.52,54.61
GND6  (via drill 0.51)
  other vias: 28.8,65.82 12.99,77.5 53.56,77.37 37.41,65.81
  pour Top: 6.86,57.91 59.18,57.91 59.18,78.74 6.86,78.74
  pour Bottom: 6.86,57.91 59.18,57.91 59.18,78.74 6.86,78.74
GND7  (via drill 0.51)
  other vias: 81.63,65.82 65.82,77.5 106.39,77.37 90.24,65.81
  pour Top: 59.69,57.91 112.01,57.91 112.01,78.74 59.69,78.74
  pour Bottom: 59.69,57.91 112.01,57.91 112.01,78.74 59.69,78.74
GND8  (via drill 0.51)
  other vias: 134.46,65.82 118.65,77.5 159.23,77.37 143.07,65.81
  pour Top: 112.52,57.91 164.85,57.91 164.85,78.74 112.52,78.74
  pour Bottom: 112.52,57.91 164.85,57.91 164.85,78.74 112.52,78.74
GND9  (via drill 0.51)
  other vias: 28.8,89.95 12.99,101.63 53.56,101.5 37.41,89.94
  pour Top: 6.86,82.04 59.18,82.04 59.18,102.87 6.86,102.87
  pour Bottom: 6.86,82.04 59.18,82.04 59.18,102.87 6.86,102.87
GND10  (via drill 0.51)
  other vias: 81.63,89.95 65.82,101.63 106.39,101.5 90.24,89.94
  pour Top: 59.69,82.04 112.01,82.04 112.01,102.87 59.69,102.87
  pour Bottom: 59.69,82.04 112.01,82.04 112.01,102.87 59.69,102.87
GND11  (via drill 0.51)
  other vias: 134.46,89.95 118.65,101.63 159.23,101.5 143.07,89.94
  pour Top: 112.52,82.04 164.85,82.04 164.85,102.87 112.52,102.87
  pour Bottom: 112.52,82.04 164.85,82.04 164.85,102.87 112.52,102.87
GND12  (via drill 0.51)
  other vias: 28.8,114.08 12.99,125.76 53.56,125.63 37.41,114.07
  pour Top: 6.86,106.17 59.18,106.17 59.18,127 6.86,127
  pour Bottom: 6.86,106.17 59.18,106.17 59.18,127 6.86,127
GND13  (via drill 0.51)
  other vias: 81.63,114.08 65.82,125.76 106.39,125.63 90.24,114.07
  pour Top: 59.69,106.17 112.01,106.17 112.01,127 59.69,127
  pour Bottom: 59.69,106.17 112.01,106.17 112.01,127 59.69,127
GND14  (via drill 0.51)
  other vias: 134.46,114.08 118.65,125.76 159.23,125.63 143.07,114.07
  pour Top: 112.52,106.17 164.85,106.17 164.85,127 112.52,127
  pour Bottom: 112.52,106.17 164.85,106.17 164.85,127 112.52,127
GND15  (via drill 0.51)
  other vias: 28.8,138.21 12.99,149.89 53.56,149.76 37.41,138.2
  pour Top: 6.86,130.3 59.18,130.3 59.18,151.13 6.86,151.13
  pour Bottom: 6.86,130.3 59.18,130.3 59.18,151.13 6.86,151.13
GND16  (via drill 0.51)
  other vias: 81.63,138.21 65.82,149.89 106.39,149.76 90.24,138.2
  pour Top: 59.69,130.3 112.01,130.3 112.01,151.13 59.69,151.13
  pour Bottom: 59.69,130.3 112.01,130.3 112.01,151.13 59.69,151.13
GND17  (via drill 0.51)
  other vias: 134.46,138.21 118.65,149.89 159.23,149.76 143.07,138.2
  pour Top: 112.52,130.3 164.85,130.3 164.85,151.13 112.52,151.13
  pour Bottom: 112.52,130.3 164.85,130.3 164.85,151.13 112.52,151.13
GND18  (via drill 0.51)
  other vias: 28.8,162.34 12.99,174.02 53.56,173.89 37.41,162.33
  pour Top: 6.86,154.43 59.18,154.43 59.18,175.26 6.86,175.26
  pour Bottom: 6.86,154.43 59.18,154.43 59.18,175.26 6.86,175.26
GND19  (via drill 0.51)
  other vias: 81.63,162.34 65.82,174.02 106.39,173.89 90.24,162.33
  pour Top: 59.69,154.43 112.01,154.43 112.01,175.26 59.69,175.26
  pour Bottom: 59.69,154.43 112.01,154.43 112.01,175.26 59.69,175.26
GND20  (via drill 0.51)
  other vias: 134.46,162.34 118.65,174.02 159.23,173.89 143.07,162.33
  pour Top: 112.52,154.43 164.85,154.43 164.85,175.26 112.52,175.26
  pour Bottom: 112.52,154.43 164.85,154.43 164.85,175.26 112.52,175.26
GND21  (via drill 0.51)
  other vias: 28.8,186.47 12.99,198.15 53.56,198.02 37.41,186.46
  pour Top: 6.86,178.56 59.18,178.56 59.18,199.39 6.86,199.39
  pour Bottom: 6.86,178.56 59.18,178.56 59.18,199.39 6.86,199.39
GND22  (via drill 0.51)
  other vias: 81.63,186.47 65.82,198.15 106.39,198.02 90.24,186.46
  pour Top: 59.69,178.56 112.01,178.56 112.01,199.39 59.69,199.39
  pour Bottom: 59.69,178.56 112.01,178.56 112.01,199.39 59.69,199.39
GND23  (via drill 0.51)
  other vias: 134.46,186.47 118.65,198.15 159.23,198.02 143.07,186.46
  pour Top: 112.52,178.56 164.85,178.56 164.85,199.39 112.52,199.39
  pour Bottom: 112.52,178.56 164.85,178.56 164.85,199.39 112.52,199.39
GND24  (via drill 0.51)
  other vias: 28.8,210.6 12.99,222.28 53.56,222.15 37.41,210.59
  pour Top: 6.86,202.69 59.18,202.69 59.18,223.52 6.86,223.52
  pour Bottom: 6.86,202.69 59.18,202.69 59.18,223.52 6.86,223.52
GND25  (via drill 0.51)
  other vias: 81.63,210.6 65.82,222.28 106.39,222.15 90.24,210.59
  pour Top: 59.69,202.69 112.01,202.69 112.01,223.52 59.69,223.52
  pour Bottom: 59.69,202.69 112.01,202.69 112.01,223.52 59.69,223.52
GND26  (via drill 0.51)
  other vias: 134.46,210.6 118.65,222.28 159.23,222.15 143.07,210.59
  pour Top: 112.52,202.69 164.85,202.69 164.85,223.52 112.52,223.52
  pour Bottom: 112.52,202.69 164.85,202.69 164.85,223.52 112.52,223.52
GND27  (via drill 0.51)
  other vias: 28.8,234.73 12.99,246.41 53.56,246.28 37.41,234.72
  pour Top: 6.86,226.82 59.18,226.82 59.18,247.65 6.86,247.65
  pour Bottom: 6.86,226.82 59.18,226.82 59.18,247.65 6.86,247.65
GND28  (via drill 0.51)
  other vias: 81.63,234.73 65.82,246.41 106.39,246.28 90.24,234.72
  pour Top: 59.69,226.82 112.01,226.82 112.01,247.65 59.69,247.65
  pour Bottom: 59.69,226.82 112.01,226.82 112.01,247.65 59.69,247.65
GND29  (via drill 0.51)
  other vias: 134.46,234.73 118.65,246.41 159.23,246.28 143.07,234.72
  pour Top: 112.52,226.82 164.85,226.82 164.85,247.65 112.52,247.65
  pour Bottom: 112.52,226.82 164.85,226.82 164.85,247.65 112.52,247.65
N$1  (via drill 3.3)
  other vias: 63.75,26.54
N$2  (via drill 3.3)
  other vias: 107.95,13.59
N$3  (via drill 3.3)
  other vias: 10.92,26.54
N$4  (via drill 3.3)
  other vias: 55.12,13.59
N$5  (via drill 3.3)
  other vias: 116.59,26.54
N$6  (via drill 3.3)
  other vias: 160.78,13.59
N$7  (via drill 3.3)
  other vias: 10.92,50.67
N$8  (via drill 3.3)
  other vias: 55.12,37.72
N$9  (via drill 3.3)
  other vias: 63.75,50.67
N$10  (via drill 3.3)
  other vias: 107.95,37.72
N$11  (via drill 3.3)
  other vias: 116.59,50.67
N$12  (via drill 3.3)
  other vias: 160.78,37.72
N$13  (via drill 3.3)
  other vias: 10.92,74.8
N$14  (via drill 3.3)
  other vias: 55.12,61.85
N$15  (via drill 3.3)
  other vias: 63.75,74.8
N$16  (via drill 3.3)
  other vias: 107.95,61.85
N$17  (via drill 3.3)
  other vias: 116.59,74.8
N$18  (via drill 3.3)
  other vias: 160.78,61.85
N$19  (via drill 3.3)
  other vias: 10.92,98.93
N$20  (via drill 3.3)
  other vias: 55.12,85.98
N$21  (via drill 3.3)
  other vias: 63.75,98.93
N$22  (via drill 3.3)
  other vias: 107.95,85.98
N$23  (via drill 3.3)
  other vias: 116.59,98.93
N$24  (via drill 3.3)
  other vias: 160.78,85.98
N$25  (via drill 3.3)
  other vias: 10.92,123.06
N$26  (via drill 3.3)
  other vias: 55.12,110.11
N$27  (via drill 3.3)
  other vias: 63.75,123.06
N$28  (via drill 3.3)
  other vias: 107.95,110.11
N$29  (via drill 3.3)
  other vias: 116.59,123.06
N$30  (via drill 3.3)
  other vias: 160.78,110.11
N$31  (via drill 3.3)
  other vias: 10.92,147.19
N$32  (via drill 3.3)
  other vias: 55.12,134.24
N$33  (via drill 3.3)
  other vias: 63.75,147.19
N$34  (via drill 3.3)
  other vias: 107.95,134.24
N$35  (via drill 3.3)
  other vias: 116.59,147.19
N$36  (via drill 3.3)
  other vias: 160.78,134.24
N$37  (via drill 3.3)
  other vias: 10.92,171.32
N$38  (via drill 3.3)
  other vias: 55.12,158.37
N$39  (via drill 3.3)
  other vias: 63.75,171.32
N$40  (via drill 3.3)
  other vias: 107.95,158.37
N$41  (via drill 3.3)
  other vias: 116.59,171.32
N$42  (via drill 3.3)
  other vias: 160.78,158.37
N$43  (via drill 3.3)
  other vias: 10.92,195.45
N$44  (via drill 3.3)
  other vias: 55.12,182.5
N$45  (via drill 3.3)
  other vias: 63.75,195.45
N$46  (via drill 3.3)
  other vias: 107.95,182.5
N$47  (via drill 3.3)
  other vias: 116.59,195.45
N$48  (via drill 3.3)
  other vias: 160.78,182.5
N$49  (via drill 3.3)
  other vias: 10.92,219.58
N$50  (via drill 3.3)
  other vias: 55.12,206.63
N$51  (via drill 3.3)
  other vias: 63.75,219.58
N$52  (via drill 3.3)
  other vias: 107.95,206.63
N$53  (via drill 3.3)
  other vias: 116.59,219.58
N$54  (via drill 3.3)
  other vias: 160.78,206.63
N$55  (via drill 3.3)
  other vias: 10.92,243.71
N$56  (via drill 3.3)
  other vias: 55.12,230.76
N$57  (via drill 3.3)
  other vias: 63.75,243.71
N$58  (via drill 3.3)
  other vias: 107.95,230.76
N$59  (via drill 3.3)
  other vias: 116.59,243.71
N$60  (via drill 3.3)
  other vias: 160.78,230.76
VCC  (via drill 0.6)
  Top 0.406: BAT1.1 56.55,21.56 JP2.1 | BAT2.1 v10.59,21.34
  Bottom 0.406: v10.59,21.34 11.86,22.61 JP2.1
VCC1  (via drill 0.6)
  Top 0.406: BAT3.1 109.39,21.56 JP5.1 | BAT4.1 v63.42,21.34
  Bottom 0.406: v63.42,21.34 64.69,22.61 JP5.1
VCC2  (via drill 0.6)
  Top 0.406: BAT5.1 162.22,21.56 JP9.1 | BAT6.1 v116.25,21.34
  Bottom 0.406: v116.25,21.34 117.52,22.61 JP9.1
VCC3  (via drill 0.6)
  Top 0.406: BAT7.1 56.55,45.69 JP13.1 | BAT8.1 v10.59,45.47
  Bottom 0.406: v10.59,45.47 11.86,46.74 JP13.1
VCC4  (via drill 0.6)
  Top 0.406: BAT9.1 109.39,45.69 JP17.1 | BAT10.1 v63.42,45.47
  Bottom 0.406: v63.42,45.47 64.69,46.74 JP17.1
VCC5  (via drill 0.6)
  Top 0.406: BAT11.1 162.22,45.69 JP21.1 | BAT12.1 v116.25,45.47
  Bottom 0.406: v116.25,45.47 117.52,46.74 JP21.1
VCC6  (via drill 0.6)
  Top 0.406: BAT13.1 56.55,69.82 JP25.1 | BAT14.1 v10.59,69.6
  Bottom 0.406: v10.59,69.6 11.86,70.87 JP25.1
VCC7  (via drill 0.6)
  Top 0.406: BAT15.1 109.39,69.82 JP29.1 | BAT16.1 v63.42,69.6
  Bottom 0.406: v63.42,69.6 64.69,70.87 JP29.1
VCC8  (via drill 0.6)
  Top 0.406: BAT17.1 162.22,69.82 JP33.1 | BAT18.1 v116.25,69.6
  Bottom 0.406: v116.25,69.6 117.52,70.87 JP33.1
VCC9  (via drill 0.6)
  Top 0.406: BAT19.1 56.55,93.95 JP37.1 | BAT20.1 v10.59,93.73
  Bottom 0.406: v10.59,93.73 11.86,95 JP37.1
VCC10  (via drill 0.6)
  Top 0.406: BAT21.1 109.39,93.95 JP41.1 | BAT22.1 v63.42,93.73
  Bottom 0.406: v63.42,93.73 64.69,95 JP41.1
VCC11  (via drill 0.6)
  Top 0.406: BAT23.1 162.22,93.95 JP45.1 | BAT24.1 v116.25,93.73
  Bottom 0.406: v116.25,93.73 117.52,95 JP45.1
VCC12  (via drill 0.6)
  Top 0.406: BAT25.1 56.55,118.08 JP49.1 | BAT26.1 v10.59,117.86
  Bottom 0.406: v10.59,117.86 11.86,119.13 JP49.1
VCC13  (via drill 0.6)
  Top 0.406: BAT27.1 109.39,118.08 JP53.1 | BAT28.1 v63.42,117.86
  Bottom 0.406: v63.42,117.86 64.69,119.13 JP53.1
VCC14  (via drill 0.6)
  Top 0.406: BAT29.1 162.22,118.08 JP57.1 | BAT30.1 v116.25,117.86
  Bottom 0.406: v116.25,117.86 117.52,119.13 JP57.1
VCC15  (via drill 0.6)
  Top 0.406: BAT31.1 56.55,142.21 JP61.1 | BAT32.1 v10.59,141.99
  Bottom 0.406: v10.59,141.99 11.86,143.26 JP61.1
VCC16  (via drill 0.6)
  Top 0.406: BAT33.1 109.39,142.21 JP65.1 | BAT34.1 v63.42,141.99
  Bottom 0.406: v63.42,141.99 64.69,143.26 JP65.1
VCC17  (via drill 0.6)
  Top 0.406: BAT35.1 162.22,142.21 JP69.1 | BAT36.1 v116.25,141.99
  Bottom 0.406: v116.25,141.99 117.52,143.26 JP69.1
VCC18  (via drill 0.6)
  Top 0.406: BAT37.1 56.55,166.34 JP73.1 | BAT38.1 v10.59,166.12
  Bottom 0.406: v10.59,166.12 11.86,167.39 JP73.1
VCC19  (via drill 0.6)
  Top 0.406: BAT39.1 109.39,166.34 JP77.1 | BAT40.1 v63.42,166.12
  Bottom 0.406: v63.42,166.12 64.69,167.39 JP77.1
VCC20  (via drill 0.6)
  Top 0.406: BAT41.1 162.22,166.34 JP81.1 | BAT42.1 v116.25,166.12
  Bottom 0.406: v116.25,166.12 117.52,167.39 JP81.1
VCC21  (via drill 0.6)
  Top 0.406: BAT43.1 56.55,190.47 JP85.1 | BAT44.1 v10.59,190.25
  Bottom 0.406: v10.59,190.25 11.86,191.52 JP85.1
VCC22  (via drill 0.6)
  Top 0.406: BAT45.1 109.39,190.47 JP89.1 | BAT46.1 v63.42,190.25
  Bottom 0.406: v63.42,190.25 64.69,191.52 JP89.1
VCC23  (via drill 0.6)
  Top 0.406: BAT47.1 162.22,190.47 JP93.1 | BAT48.1 v116.25,190.25
  Bottom 0.406: v116.25,190.25 117.52,191.52 JP93.1
VCC24  (via drill 0.6)
  Top 0.406: BAT49.1 56.55,214.6 JP97.1 | BAT50.1 v10.59,214.38
  Bottom 0.406: v10.59,214.38 11.86,215.65 JP97.1
VCC25  (via drill 0.6)
  Top 0.406: BAT51.1 109.39,214.6 JP101.1 | BAT52.1 v63.42,214.38
  Bottom 0.406: v63.42,214.38 64.69,215.65 JP101.1
VCC26  (via drill 0.6)
  Top 0.406: BAT53.1 162.22,214.6 JP105.1 | BAT54.1 v116.25,214.38
  Bottom 0.406: v116.25,214.38 117.52,215.65 JP105.1
VCC27  (via drill 0.6)
  Top 0.406: BAT55.1 56.55,238.73 JP109.1 | BAT56.1 v10.59,238.51
  Bottom 0.406: v10.59,238.51 11.86,239.78 JP109.1
VCC28  (via drill 0.6)
  Top 0.406: BAT57.1 109.39,238.73 JP113.1 | BAT58.1 v63.42,238.51
  Bottom 0.406: v63.42,238.51 64.69,239.78 JP113.1
VCC29  (via drill 0.6)
  Top 0.406: BAT59.1 162.22,238.73 JP117.1 | BAT60.1 v116.25,238.51
  Bottom 0.406: v116.25,238.51 117.52,239.78 JP117.1

## Text on the board
Top: v10 | v10 | v10 | v10 | v10 | v10 | v10 | v10 | v10 | v10 | v10 | v10 | v10 | v10 | v10 | v10 | v10 | v10 | v10 | v10 | v10 | v10 | v10 | v10 | v10 | v10 | v10 | v10 | v10 | v10
Dimension: Route Out | Route Out | Route Out | Route Out | Route Out | Route Out | Route Out | Route Out | Route Out | Route Out | Route Out | Route Out | Route Out | Route Out | Route Out | Route Out | Route Out | Route Out | Route Out | Route Out | Route Out | Route Out | Route Out | Route Out | Route Out | Route Out | Route Out | Route Out | Route Out | Route Out | Route Out | Route Out | Route Out | Route Out | Route Out | Route Out | Route Out | Route Out | Route Out | Route Out | Route Out | Route Out | Route Out | Route Out
tPlace: + | + | + | RAW | RAW | RAW | - | - | - | SIG | SIG | SIG | + | + | + | RAW | RAW | RAW | - | - | - | SIG | SIG | SIG | + | + | + | RAW | RAW | RAW | - | - | - | SIG | SIG | SIG | + | + | + | RAW | RAW | RAW | - | - | - | SIG | SIG | SIG | + | + | + | RAW | RAW | RAW | - | - | - | SIG | SIG | SIG | + | + | + | RAW | RAW | RAW | - | - | - | SIG | SIG | SIG | + | + | + | RAW | RAW | RAW | - | - | - | SIG | SIG | SIG | + | + | + | RAW | RAW | RAW | - | - | - | SIG | SIG | SIG | + | + | + | RAW | RAW | RAW | - | - | - | SIG | SIG | SIG | + | + | + | RAW | RAW | RAW | - | - | - | SIG | SIG | SIG
bPlace: Insert batteries (-) side to PCB | Insert batteries (-) side to PCB | Insert batteries (-) side to PCB | RAW | +VS | RAW | +VS | RAW | +VS | SHLD | GND | SHLD | GND | SHLD | GND | GND | SIG | GND | SIG | GND | SIG | Power Shield | Power Shield | Power Shield | Insert batteries (-) side to PCB | Insert batteries (-) side to PCB | Insert batteries (-) side to PCB | RAW | +VS | RAW | +VS | RAW | +VS | SHLD | GND | SHLD | GND | SHLD | GND | GND | SIG | GND | SIG | GND | SIG | Power Shield | Power Shield | Power Shield | Insert batteries (-) side to PCB | Insert batteries (-) side to PCB | Insert batteries (-) side to PCB | RAW | +VS | RAW | +VS | RAW | +VS | SHLD | GND | SHLD | GND | SHLD | GND | GND | SIG | GND | SIG | GND | SIG | Power Shield | Power Shield | Power Shield | Insert batteries (-) side to PCB | Insert batteries (-) side to PCB | Insert batteries (-) side to PCB | RAW | +VS | RAW | +VS | RAW | +VS | SHLD | GND | SHLD | GND | SHLD | GND | GND | SIG | GND | SIG | GND | SIG | Power Shield | Power Shield | Power Shield | Insert batteries (-) side to PCB | Insert batteries (-) side to PCB | Insert batteries (-) side to PCB | RAW | +VS | RAW | +VS | RAW | +VS | SHLD | GND | SHLD | GND | SHLD | GND | GND | SIG | GND | SIG | GND | SIG | Power Shield | Power Shield | Power Shield | Insert batteries (-) side to PCB | Insert batteries (-) side to PCB | Insert batteries (-) side to PCB | RAW | +VS | RAW | +VS | RAW | +VS | SHLD | GND | SHLD | GND | SHLD | GND | GND | SIG | GND | SIG | GND | SIG | Power Shield | Power Shield | Power Shield | Insert batteries (-) side to PCB | Insert batteries (-) side to PCB | Insert batteries (-) side to PCB | RAW | +VS | RAW | +VS | RAW | +VS | SHLD | GND | SHLD | GND | SHLD | GND | GND | SIG | GND | SIG | GND | SIG | Power Shield | Power Shield | Power Shield | Insert batteries (-) side to PCB | Insert batteries (-) side to PCB | Insert batteries (-) side to PCB | RAW | +VS | RAW | +VS | RAW | +VS | SHLD | GND | SHLD | GND | SHLD | GND | GND | SIG | GND | SIG | GND | SIG | Power Shield | Power Shield | Power Shield | Insert batteries (-) side to PCB | Insert batteries (-) side to PCB | Insert batteries (-) side to PCB | RAW | +VS | RAW | +VS | RAW | +VS | SHLD | GND | SHLD | GND | SHLD | GND | GND | SIG | GND | SIG | GND | SIG | Power Shield | Power Shield | Power Shield | Insert batteries (-) side to PCB | Insert batteries (-) side to PCB | Insert batteries (-) side to PCB | RAW | +VS | RAW | +VS | RAW | +VS | SHLD | GND | SHLD | GND | SHLD | GND | GND | SIG | GND | SIG | GND | SIG | Power Shield | Power Shield | Power Shield